# Altium PCB PCB1.PcbDoc
Units mil, origin at the board's own origin, x right, y up, seen from the top; angles counter-clockwise.
Board outline 6000 x 4000 mil, 4 copper layers (Top Layer, Mid-Layer 2, Mid-Layer 3, Bottom Layer); 50 components, 46 nets, 115 pads, 0 vias.
Unrouted connection lines stored in the file: 72.
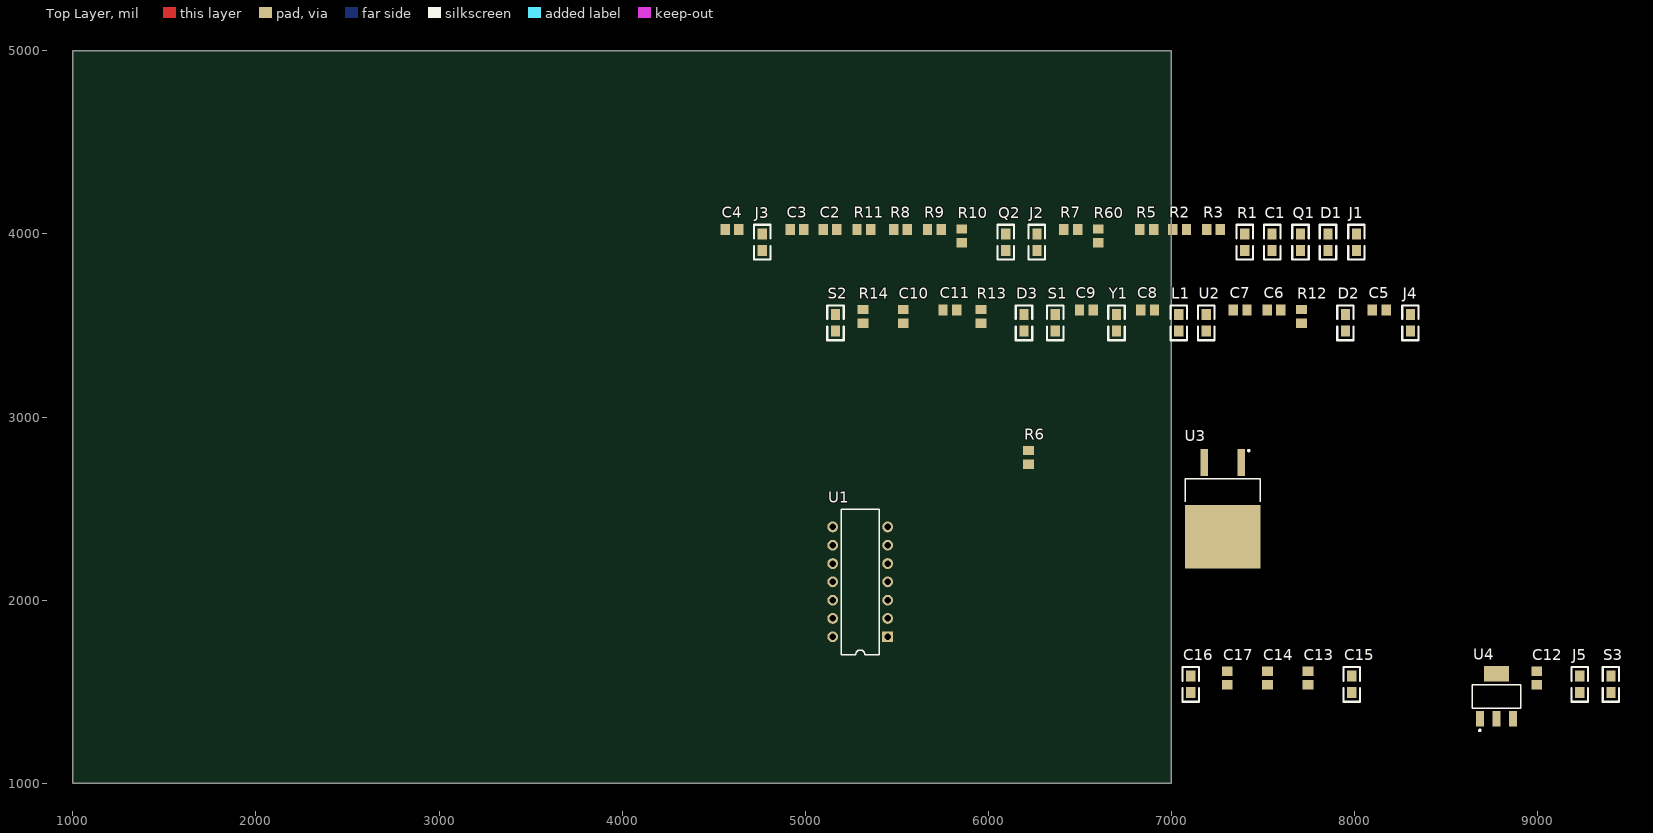
[diagram p0: Top Layer view]
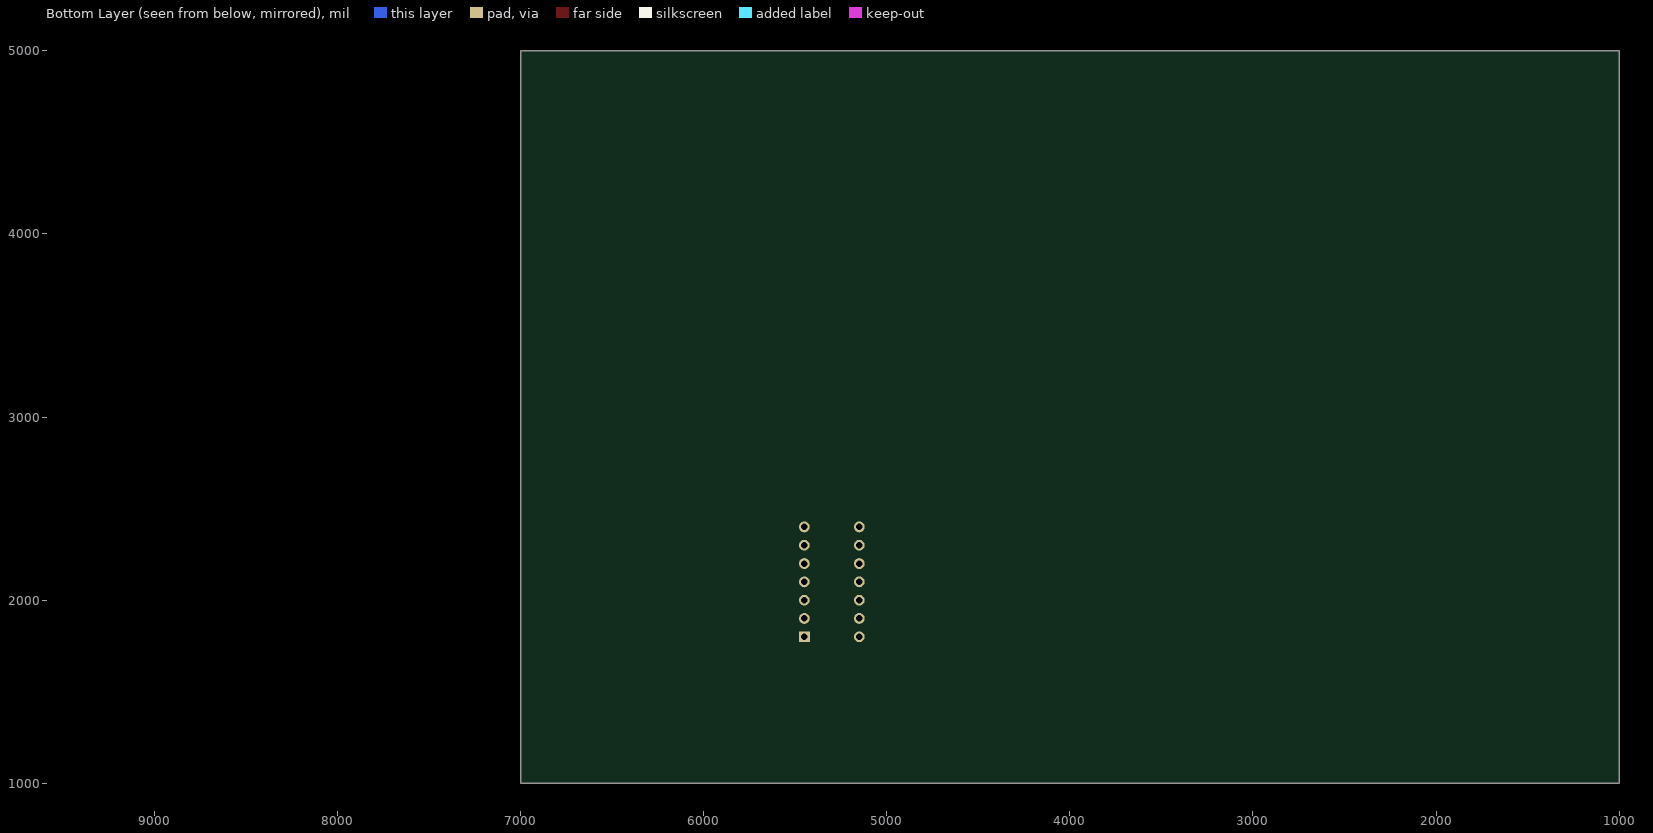
[diagram p1: Bottom Layer view, seen from below]
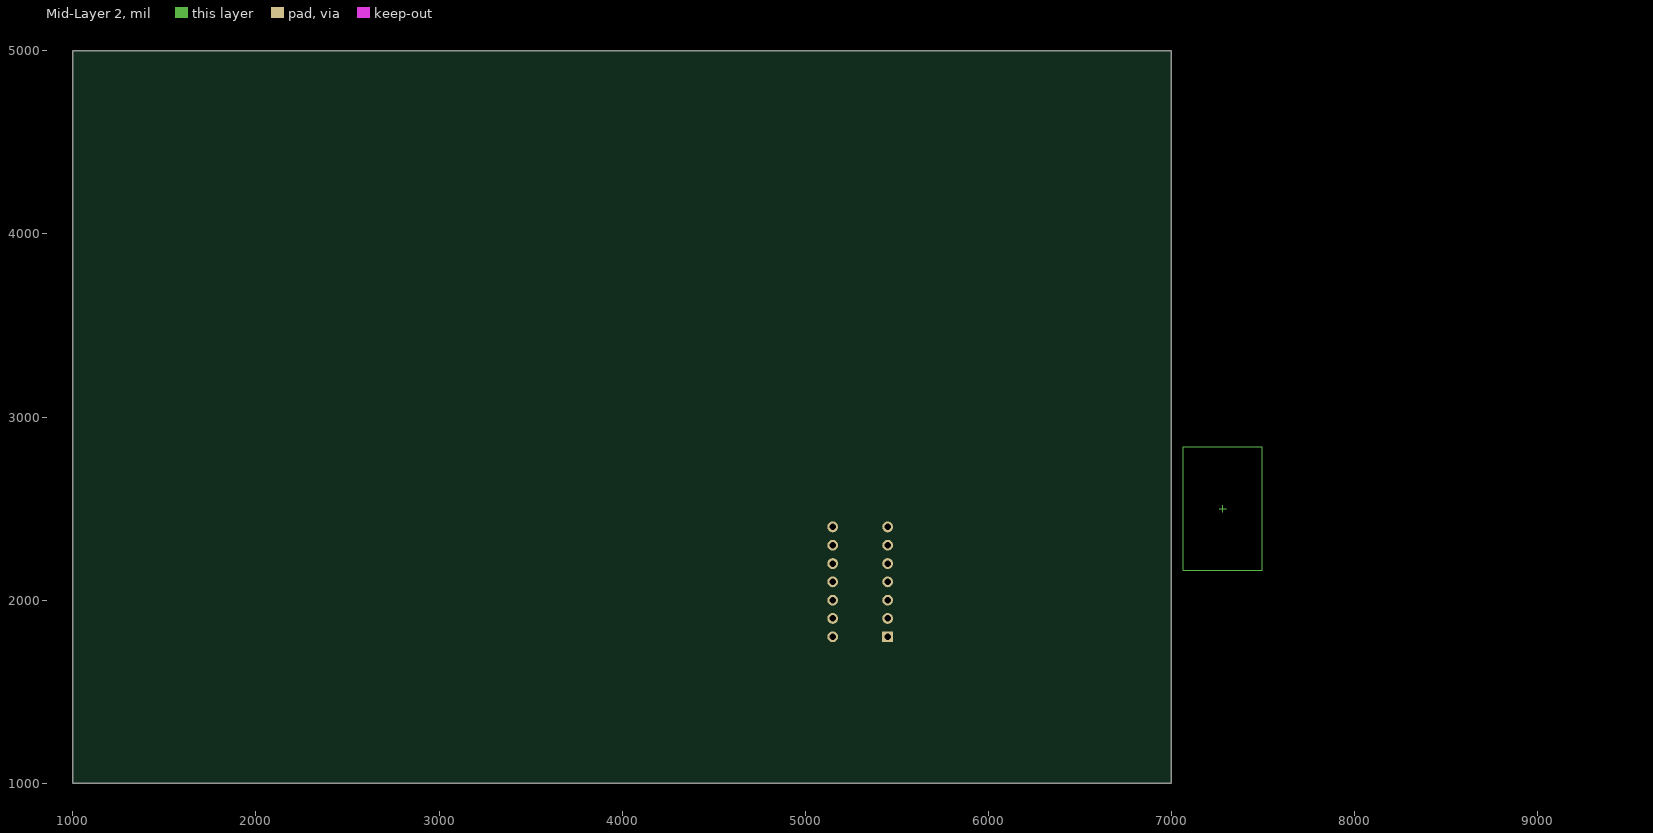
[diagram p2: Mid-Layer 2]
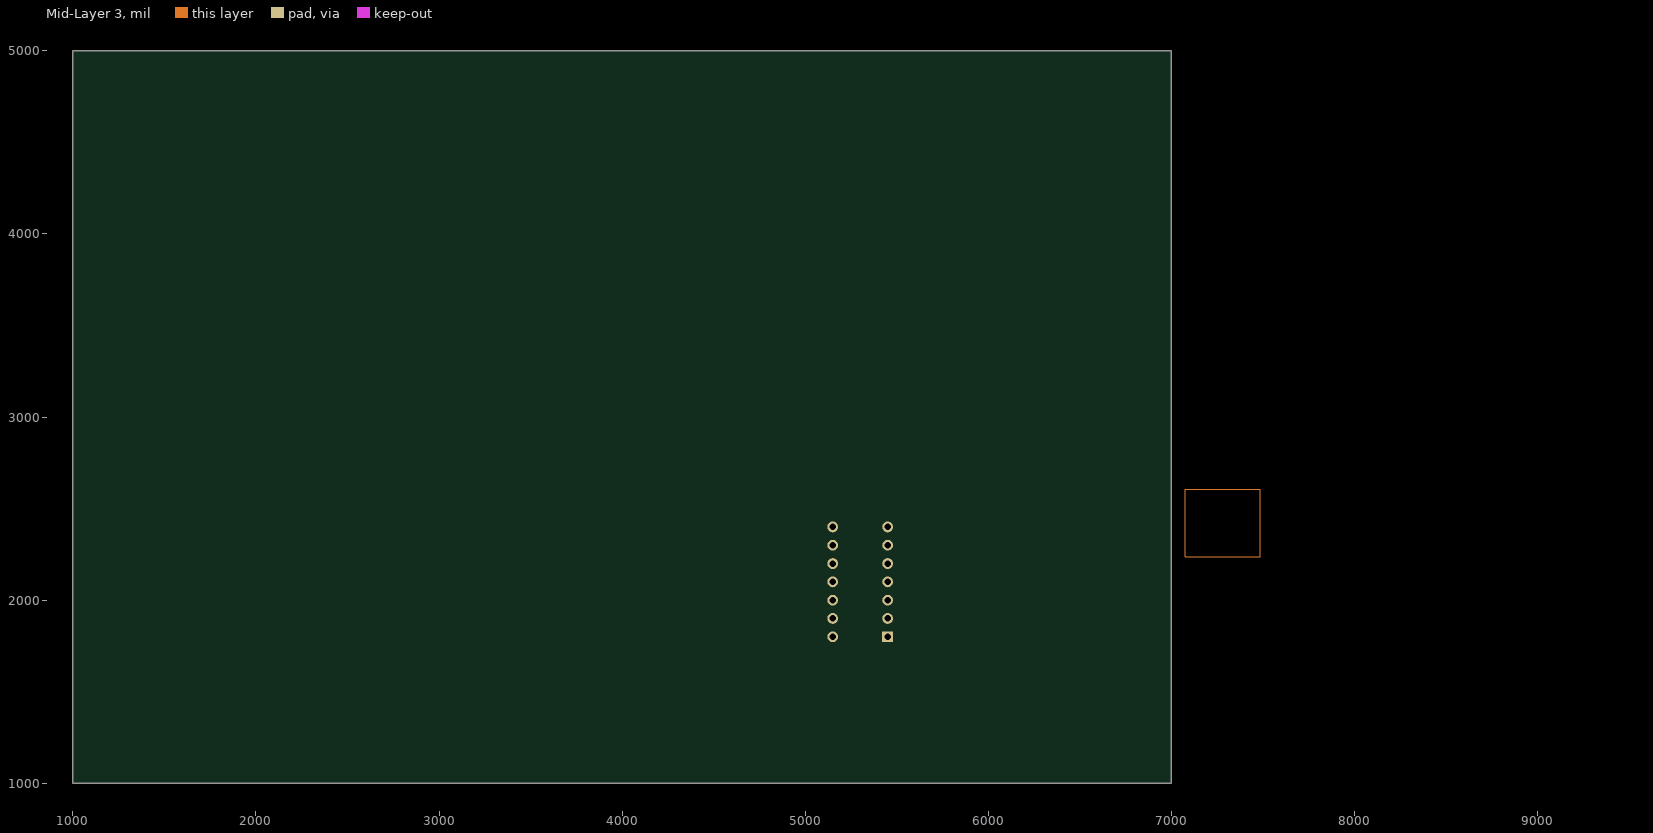
[diagram p3: Mid-Layer 3]

## Layer stack, top to bottom
Top Layer: signal copper 1.4
Dielectric: dielectric 12.6, FR-4, Dk 4.8
Mid-Layer 2: signal copper 1.4
Dielectric: dielectric 12.6, FR-4, Dk 4.8
Mid-Layer 3: signal copper 1.4
Dielectric: dielectric 12.6, FR-4, Dk 4.8
Bottom Layer: signal copper 1.4

## Board outline
1000,1000 7000,1000 7000,5000 1000,5000

## Design rules (kind name [scope] priority, off if disabled: settings)
Clearance [All] p1: gap=10
ComponentClearance [All] p1: gap=10 collisioncheckmode=3 verticalgap=10
PolygonConnect [All] p1: connectstyle=Relief reliefconductorwidth=10 reliefentries=4 polygonreliefangle="90 Angle"
RoutingVias [All] p1: holewidth=28 width=50 viastyle="Through Hole" minholewidth=28 minwidth=50 maxholewidth=28 maxwidth=50
SolderMaskExpansion [All] p1: expansion=4
TestPointUsage [All] p1: valid=0 allowmultiple=FALSE
Testpoint [All] p1: side=15 testpointundercomponent=TRUE minsize=40 maxsize=100 preferedsize=60 minholesize=0 maxholesize=40 preferedholesize=32 testpointgrid=1 style=1023 order=0-112345678
Width [All] p1: maxlimit=10 minlimit=10 preferedwidth=10
18 further rules are at their usual default settings.

## Components (designator, comment, footprint, x,y, rotation, side; value= is the part's Value field where it differs from the comment)
C1 "1UF" 0805 7550,3910 r90 top
C2 "104" 6-0805 5135,4025 r0 top
C3 "103" 6-0805 4955,4025 r0 top
C4 "103" 6-0805 4600,4025 r0 top
C5 "104" 6-0805 8135,3585 r0 top
C6 "22" 6-0805 7560,3585 r0 top
C7 "20" 6-0805 7375,3585 r0 top
C8 "6" 6-0805 6870,3585 r0 top
C9 "22" 6-0805 6535,3585 r0 top
C10 "104" 6-0805 5535,3550 r90 top
C11 "104" 6-0805 5790,3585 r0 top
C12 "104" 6-0805 8995,1575 r90 top
C13 "102" 6-0805 7745,1575 r90 top
C14 "103" 6-0805 7525,1575 r90 top
C15 "103" 0805 7985,1495 r90 top
C16 "102" 0805 7105,1495 r90 top
C17 "104" 6-0805 7305,1575 r90 top
D1 "DIODE SCHOTTKY" 0805 7855,3910 r90 top
D2 "DIODE" 0805 7950,3470 r90 top
D3 "DIODE" 0805 6195,3470 r90 top
J1 "CON3" 0805 8010,3910 r90 top
J2 "CON3" 0805 6265,3910 r90 top
J3 "CON3" 0805 4765,3910 r90 top
J4 "CON3" 0805 8305,3470 r90 top
J5 "CON2" 0805 9230,1495 r90 top
L1 "4.7UH" 0805 7040,3470 r90 top
Q1 "NPN" 0805 7705,3910 r90 top
Q2 "NPN" 0805 6095,3910 r90 top
R1 "10K" 0805 7400,3910 r90 top
R2 "100K" 6-0805 7045,4025 r0 top
R3 "35K" 6-0805 7230,4025 r0 top
R5 "4.7K" 6-0805 6865,4025 r0 top
R6 "1K" 6-0805 6220,2780 r90 top
R7 "10K" 6-0805 6450,4025 r0 top
R8 "100K" 6-0805 5520,4025 r0 top
R9 "12K" 6-0805 5705,4025 r0 top
R10 "10K" 6-0805 5855,3990 r90 top
R11 "100K" 6-0805 5320,4025 r0 top
R12 "10K" 6-0805 7710,3550 r90 top
R13 "4.7K" 6-0805 5960,3550 r90 top
R14 "4.7K" 6-0805 5315,3550 r90 top
R60 "20K" 6-0805 6600,3990 r90 top
S1 "SW DIP-5" 0805 6365,3470 r90 top
S2 "SW DIP-8" 0805 5165,3470 r90 top
S3 "SW DIP-5" 0805 9400,1495 r90 top
U1 "MC1648" DIP-14 5300,2100 r90 top
U2 "MC145163P" 0805 7190,3470 r90 top
U3 "VOLTREG" TO254P1543X460-3N_MC7805 7280,2500 r270 top
U4 "VOLTREG" SOT223 8775,1475 r0 top
Y1 "CRYSTAL" 0805 6700,3470 r90 top

## Footprints (in the part's own frame and the unit in brackets; to place one, negate y for a bottom-side part, rotate by r counter-clockwise, add the part's x,y. Pads: shape width x height; smd on the part's side, far side on the other; paste and mask are expansions set on the pad)
6-0805 [mm] "Chip Resistor; Body 2.0 x 1.3 mm (LxW typ)"
  rect 1.3x1.5 smd: 1(-0.95,0) 2(0.95,0)
0805 [mil]
  rect 60x50 smd: 1(0,0) 2(90,0)
  silkscreen extent -50,-45 140,45
DIP-14 [mm] "DIP; 14 Leads; Row Spacing 7.62 mm; Pitch 2.54 mm"
  rect 1.5x1.5 hole 0.9: 1(-7.62,-3.81)
  round 1.5 hole 0.9: 2(-5.08,-3.81) 3(-2.54,-3.81) 4(0,-3.81) 5(2.54,-3.81) 6(5.08,-3.81) 7(7.62,-3.81) 8(7.62,3.81) 9(5.08,3.81) 10(2.54,3.81) 11(0,3.81) 12(-2.54,3.81) 13(-5.08,3.81) 14(-7.62,3.81)
  silkscreen extent -10.1,-2.65 10.1,2.65
SOT223 [mm] "SOT-223/SC-73; 4 Leads; Body 6.7 x 7.3 mm, inc. leads (LxW max)"
  rect 1.1x2.15 smd: 1(-2.3,-3.1) 2(0,-3.1) 3(2.3,-3.1)
  rect 3.5x2.15 smd: 4(0,3.1)
  silkscreen extent -3.35,-4.85 3.35,1.63
TO254P1543X460-3N_MC7805 [mm]
  rect 3.75x1.05 smd: 1(-6.4,2.54) 2(-6.4,-2.54)
  rect 8.8x10.5 smd: 3(3.9,0)
  Mid-Layer 2 lines w0.05: 0,-0.5 0,0.5 ; 0.5,0 -0.5,0 ; 8.55,-5.5 -8.55,-5.5 -8.55,5.5 8.55,5.5 8.55,-5.5
  Mid-Layer 3 lines w0.001: 6.668,-5.2 -2.682,-5.2 -2.682,5.2 6.668,5.2 6.668,-5.2
  silkscreen extent -8.17,-5.2 -0.92,5.2

## Part data
C1 C15 C16: library part CAPACITOR, "Capacitor"
C2 C3 C4 C5 C6 C7 C8 C9 C10 C11 C12 C13 C14 C17: library part CAP, "Capacitor"
D1: "Schottky Diode"
D2 D3: "Diode"
J1 J2 J3 J4 J5: "Connector"
L1: library part INDUCTOR
Q1 Q2: "NPN Transistor"
R1: library part POT1, "Potentiometer"
R2 R3 R5 R6 R7 R8 R9 R10 R11 R12 R13 R14 R60: library part RES2
S1 S2 S3: "DIP Switch"
Y1: "Crystal"

## Nets (pads, with @x,y where several pads share a name; then routed paths per layer and width w, separated by ;. In a path a pad name is that pad's centre, name@x,y a point inside that pad or via, vN(x,y) a via of type N, cw(c..) or ccw(c..) an arc to the next point about the centre after c; other vN are vias at no path point)
+5V: C11.1 C13.1 C15.1 U1.1 U1.14 U4.3
+9V: C12.1 Q2.2 R1.1 R6.2 S2.1 S2.2
+12V: C14.1 J5.1 U3.1
GND: C1.2 C2.1 C5.2 C6.2 C9.2 C10.2 C11.2 C12.2 C13.2 C14.2 C15.2 C16.2 C17.2 J2.1 J5.2 R1.2 R7.2 R11.2 R12.1 R13.1 R14.1 U1.7 U1.8 U2.2 U3.3 U4.2
NetC1_1: C1.1 R3.1
NetC2_2: C2.2 J1.2 R8.2
NetC3_1: C3.1 J4.1
NetC3_2: C3.2 J2.2 R7.1
NetC4_1: C4.1 R12.2
NetC4_2: C4.2 C7.2 J3.1 J3.2 R11.1
NetC5_1: C5.1 C8.1 D2.1 L1.1 U1.10
NetC6_1: C6.1 Y1.1
NetC7_1: C7.1 U2.1
NetC8_2: C8.2 D2.2 D3.1 D3.2 L1.2 R8.1 U1.12
NetC9_1: C9.1 Y1.2
NetC10_1: C10.1 U1.5
NetC16_1: C16.1 C17.1 U3.2 U4.1
NetD1_2: D1.2 Q1.2
NetJ1_1: J1.1
NetJ1_3: R2.2
NetJ4_2: J4.2
NetQ1_1: Q1.1 R60.2
NetQ2_1: Q2.1 R10.2
NetR2_1: R2.1 R3.2 R5.2
NetR5_1: R5.1
NetR9_1: R9.1 U1.3
NetR9_2: R9.2 R10.1
NetR13_2: R13.2
NetR14_2: R14.2
NetR60_1: R60.1
NetS1_1: S1.1
NetS1_2: S1.2
NetS1_3: 
NetS1_4: 
NetS1_5: 
NetS2_9: 
NetS2_10: 
NetS2_11: 
NetS2_12: 
NetS2_13: 
NetS2_14: 
NetS3_1: S3.1
NetS3_2: S3.2
NetS3_3: 
NetS3_4: 
NetS3_5: 
pads on no net: D1.1 R6.1 U1.2 U1.4 U1.6 U1.9 U1.11 U1.13 U4.4

## Text inside footprints (layer, text, board x,y; h text height)
U3: Mechanical 15 "1" at 7273.53,2482.29 h29.53